# EAGLE board Utility Module PANEL (EAGLE 7.7.0)
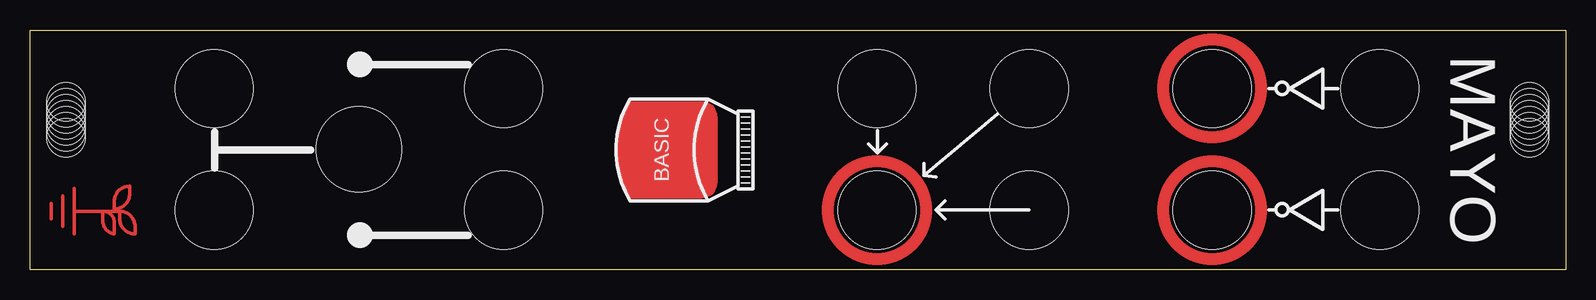
[diagram p0: board, top side]
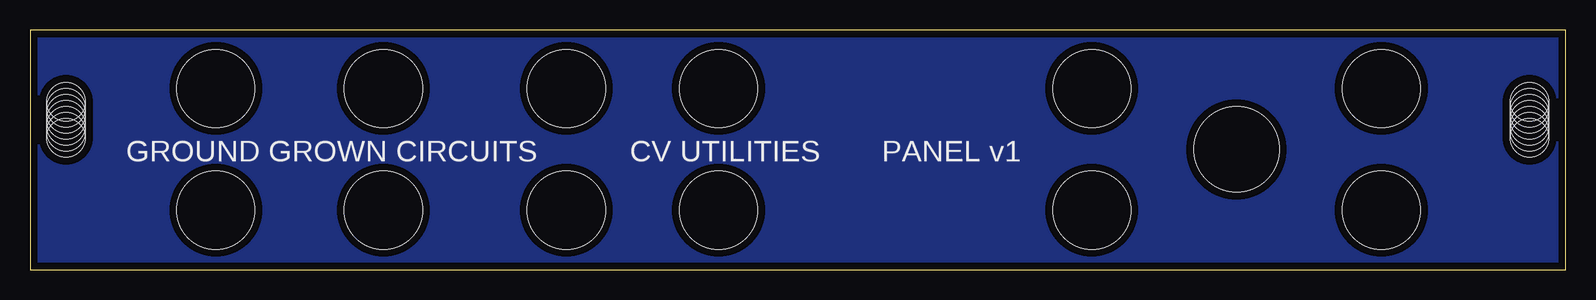
[diagram p1: board, bottom side, seen from below]

Size 128 x 20 mm. Coordinates in mm from the lower left corner, seen from the top.
Outline: 0,0 0,20 128,20 128,0 0,0
Copper layers (1*16): Top 0.035mm / dielectric 1.5mm / Bottom 0.035mm
Design rules "SparkFun": minimum track width 8mil, minimum drill 20mil, track to track 8mil, track to pad 8mil, pad to pad 8mil, via to via 8mil, smd to smd 8mil, copper to edge 8mil, drill to drill 8mil, minimum pad ring 12mil, minimum via ring 10mil, stop-mask expansion 4mil, vias tented up to drill 20mil, thermal gap 10mil

## Footprints (pad centres in the part's own frame; a part is rotated, then mirrored left to right if it is on the bottom)
MOUNT_DRILL = hole 3.2: 3,9; 3,8.5; 3,8; 3,7.5; 3,7; 3,6.5; 3,6
JACK_DRILL_COPPER_EXS = hole 6.5: 0,0
JACK_DRILL = hole 6.5: 0,0
SWITCH_DRILL = hole 7.112: 0,0

## Placement (x,y rotation side)
E$1  [MOUNT_DRILL]  128,20 180 top
E$2  [MOUNT_DRILL]  0,20 180 bottom
E$3  [JACK_DRILL_COPPER_EXS]  70.6,4.96 0 top
E$4  [JACK_DRILL]  112.51,15.12 0 top
E$5  [JACK_DRILL]  112.51,4.96 0 top
E$6  [JACK_DRILL]  83.3,4.96 0 top
E$7  [JACK_DRILL]  83.3,15.12 0 top
E$8  [JACK_DRILL]  70.6,15.12 0 top
E$9  [JACK_DRILL]  39.48,15.12 0 top
E$10  [JACK_DRILL]  39.48,4.96 0 top
E$11  [JACK_DRILL]  15.36,15.12 0 top
E$12  [JACK_DRILL]  15.36,4.96 0 top
E$13  [SWITCH_DRILL]  27.42,10.04 0 top
E$14  [JACK_DRILL_COPPER_EXS]  98.54,4.96 0 top
E$15  [JACK_DRILL_COPPER_EXS]  98.54,15.12 0 top
E$16  [LOGO_SMALL_COPPER]  3.75,4.88 270 top
E$17  [MAYO]  55,10 270 top

## Library data of the parts
E$1-E$17 = GroundGrownCircuits

## Tracks (layer width: path | path; a pad name or v marks a point on that pad's centre or on a via)
S$1
  pour Bottom (isolate 0.61): 0,0 0,20 128,20 128,0

## Text on the board
tPlace: MAYO
bPlace: PANEL v1 | CV UTILITIES | GROUND GROWN CIRCUITS